# Altium PCB SMD VR Cond Neo_2023-05-26.pcbdoc
Units mil, origin at the board's own origin, x right, y up, seen from the top; angles counter-clockwise.
Board outline 2392.95 x 2392.99 mil, 2 copper layers (Top Layer, Bottom Layer); 17 components, 16 nets, 46 pads, 9 vias.
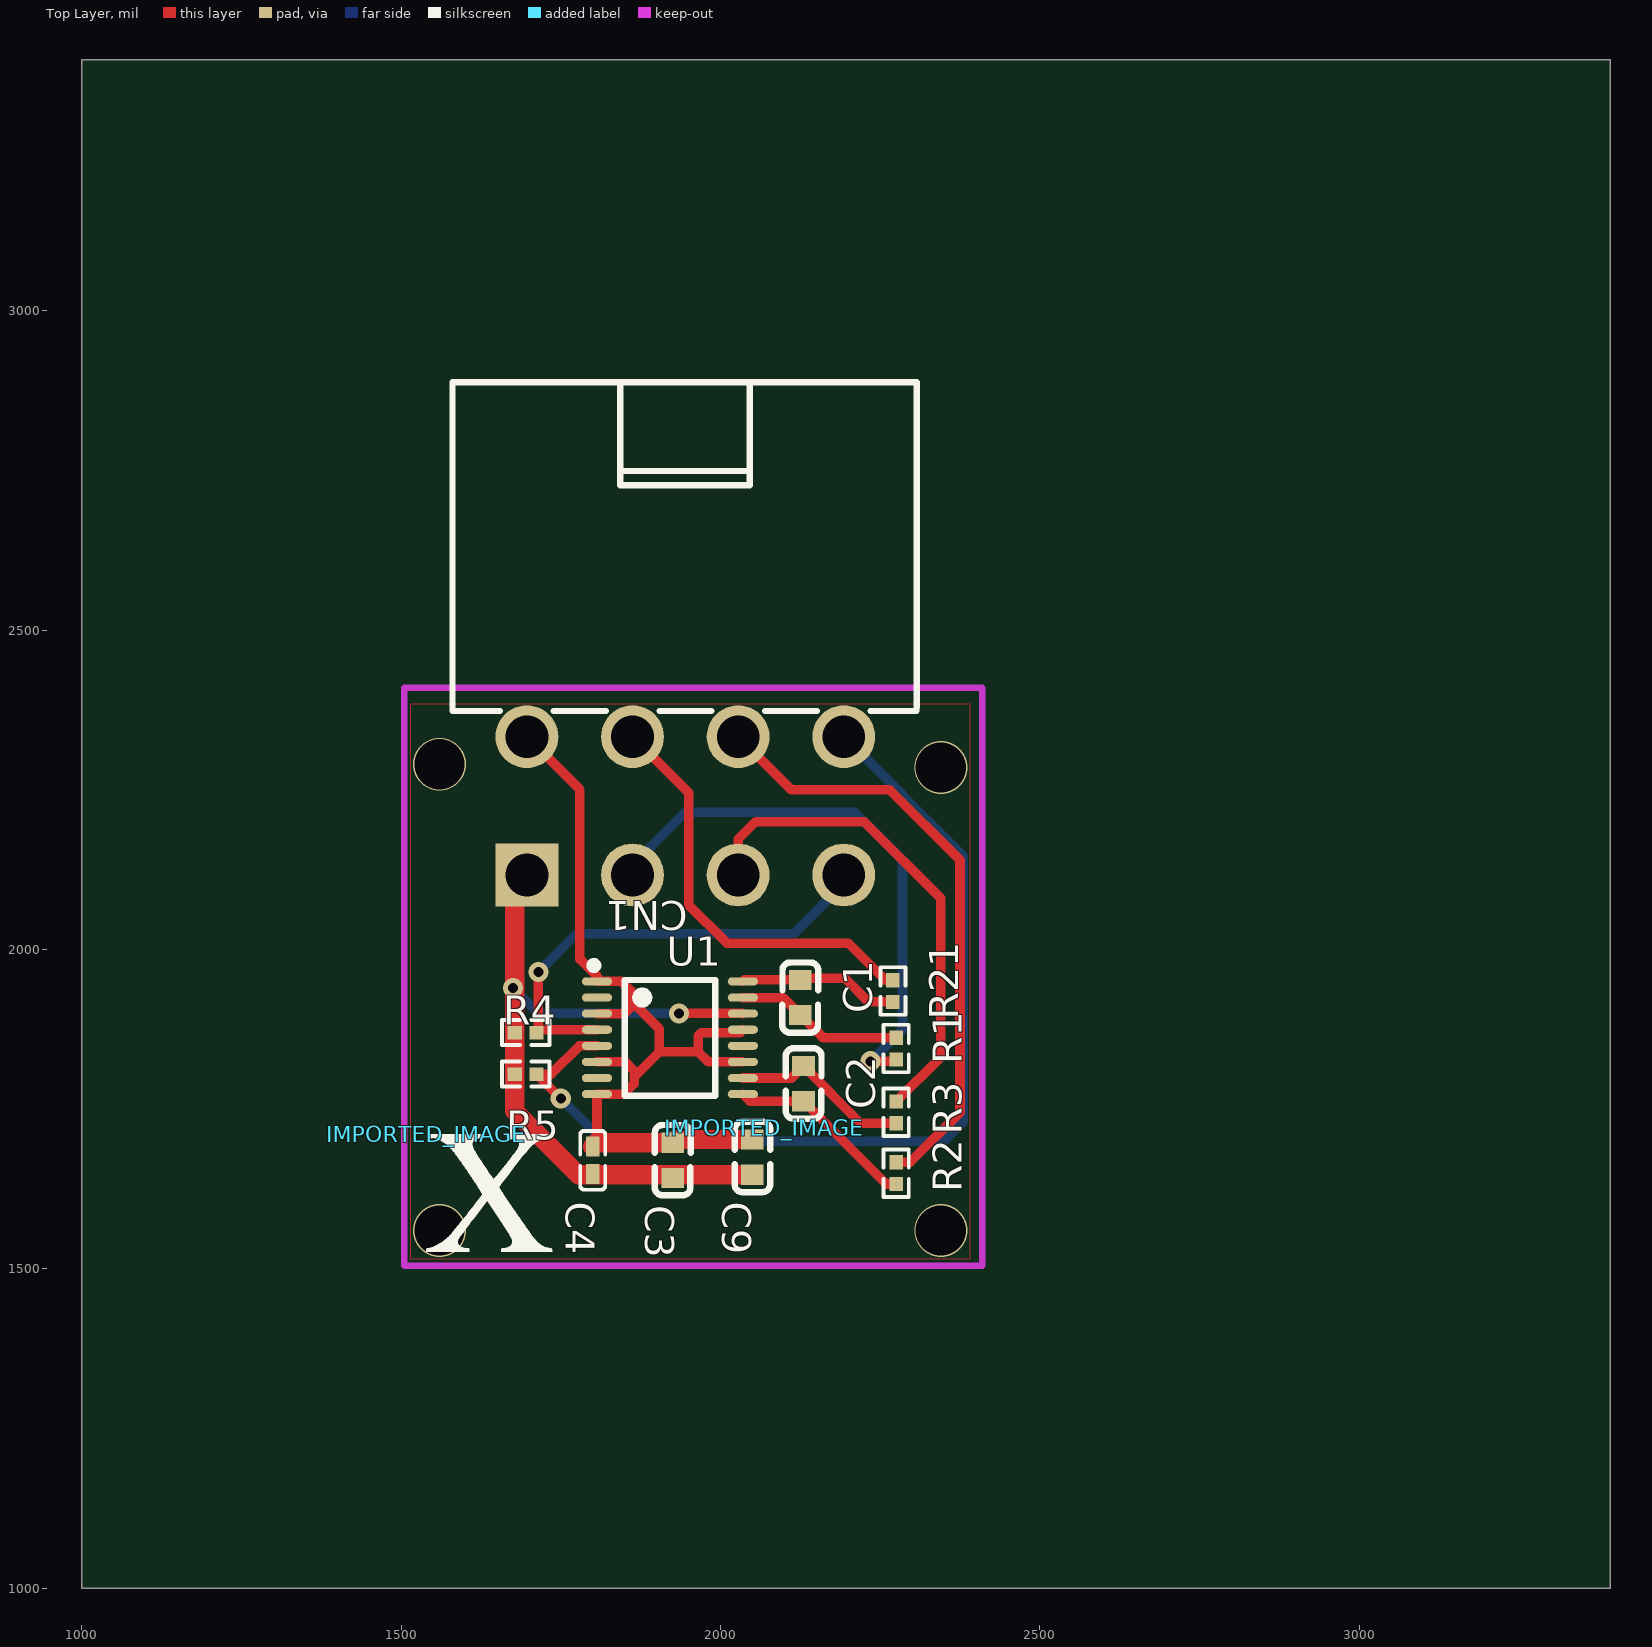
[diagram p0: Top Layer view]
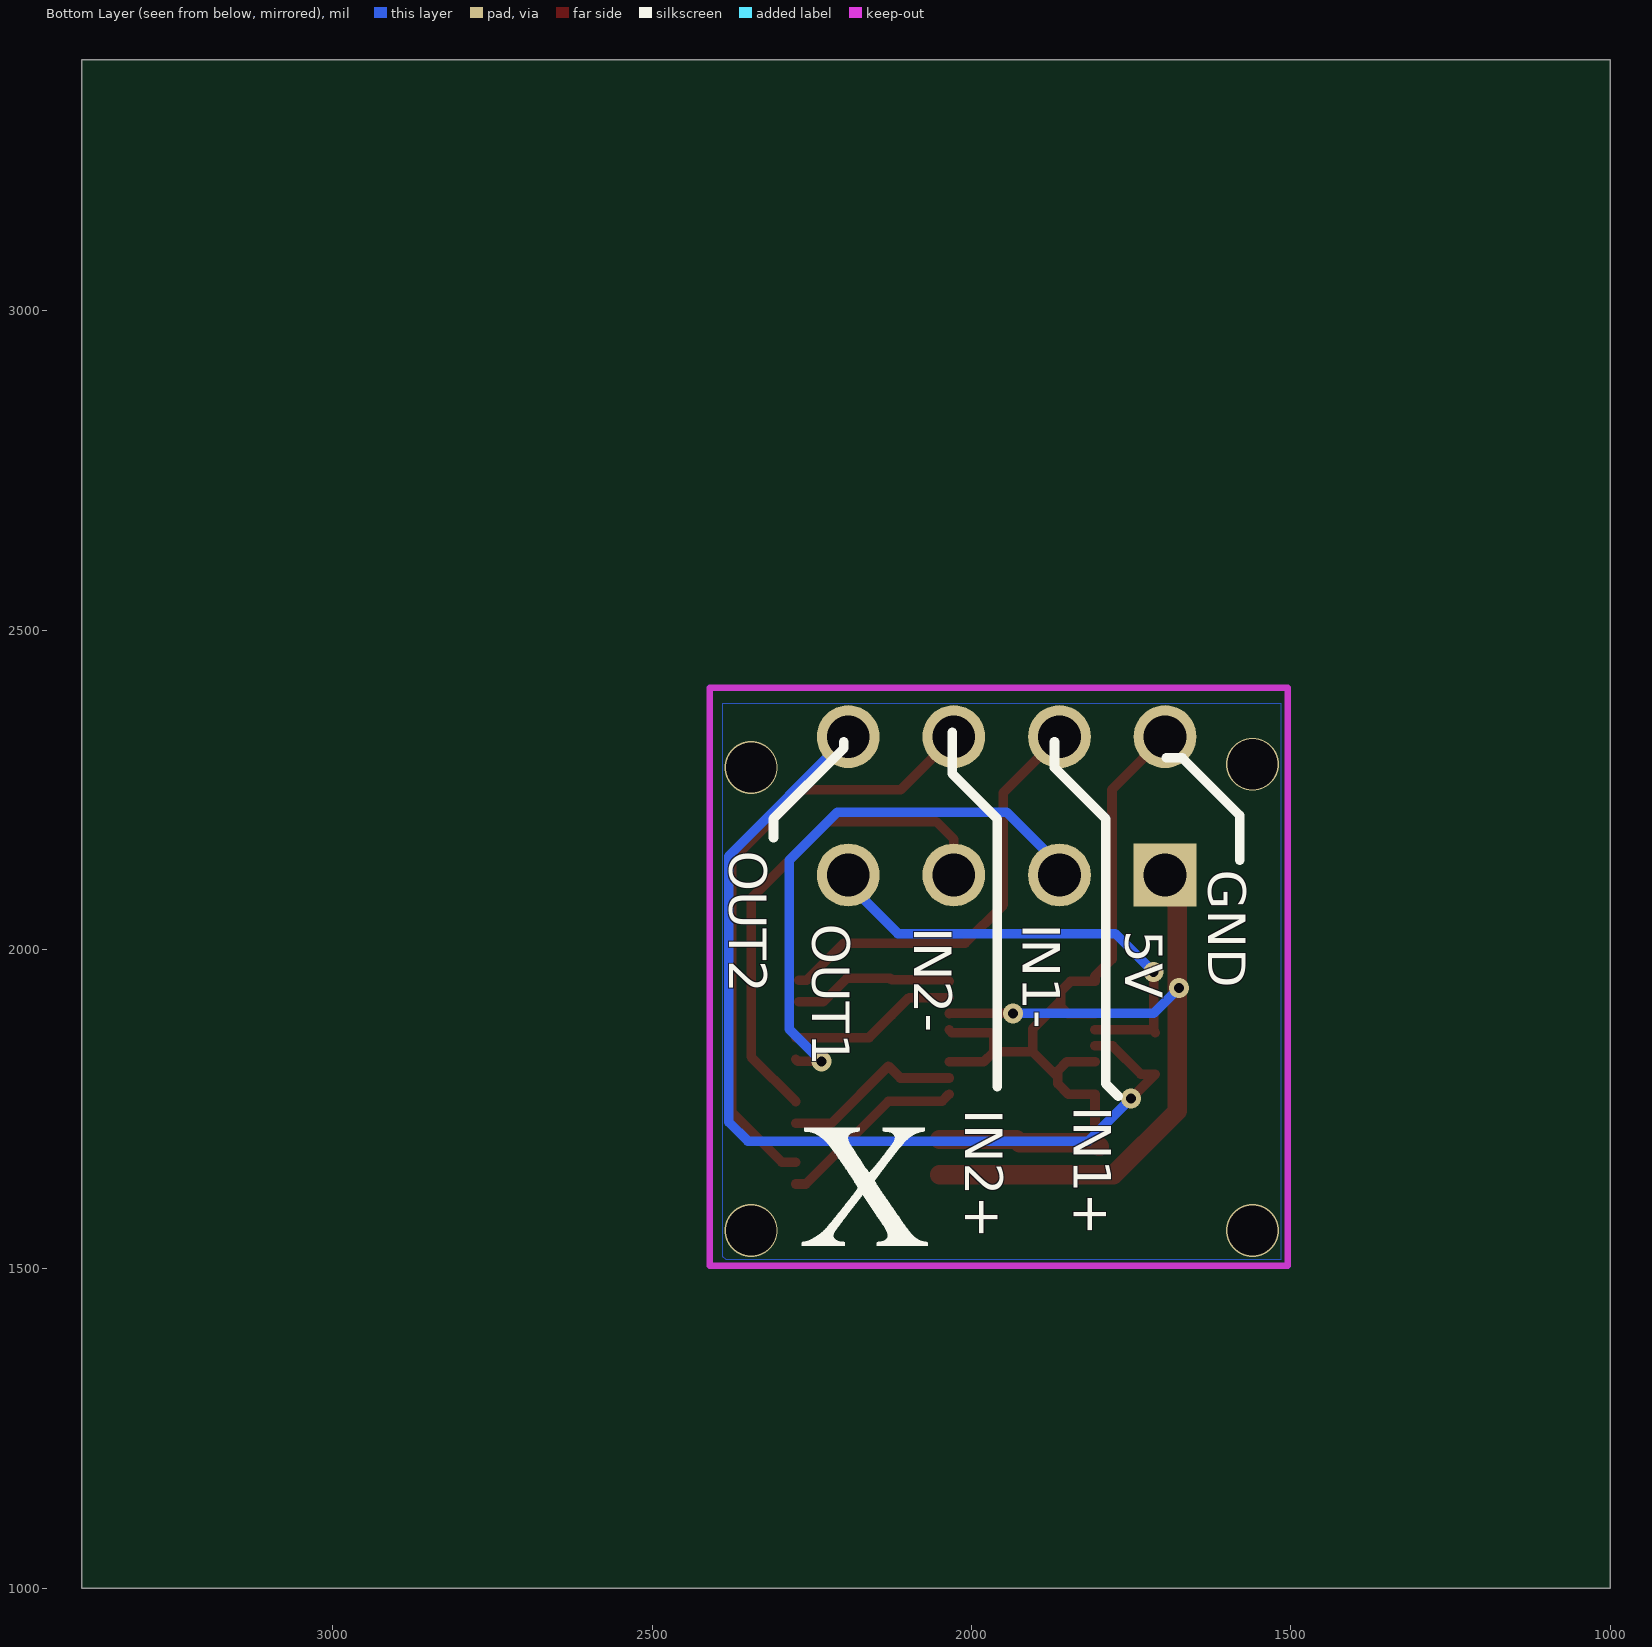
[diagram p1: Bottom Layer view, seen from below]

## Layer stack, top to bottom
Top Layer: signal copper (thickness not stored)
Dielectric: dielectric 12.6, FR-4, Dk 4.8
Bottom Layer: signal copper (thickness not stored)

## Board outline
3392.95,1000 1000,1000 1000,3392.99 3392.95,3392.99

## Components (designator, comment, footprint, x,y, rotation, side; value= is the part's Value field where it differs from the comment)
C1 "1nF" C0603 2125,1925 r90 top
C2 "1nF" C0603 2130,1790 r270 top
C3 "1uF" C0603 1925,1670 r270 top
C4 "10nF" C0402 1800,1670 r270 top
C9 "100nF" C0603 2050,1675 r270 top
CN1 "5557R-2*4P" CONN-TH_8P-P4.20_5557R-2X4P 1945,2225 r180 top
IMPORTED_IMAGE "IMPORTED_IMAGE" IMPORTED_IMAGE 1539.53,1710.7 r0 top
IMPORTED_IMAGE "IMPORTED_IMAGE" IMPORTED_IMAGE 2068.62,1720.7 r0 top
R1 "10kΩ" R0402 2275,1845 r270 top
R2 "10kΩ" R0402 2275,1650 r90 top
R3 "10kΩ" R0402 2275,1745 r90 top
R4 "10kΩ" R0402 1695,1870 r0 top
R5 "10kΩ" R0402 1695,1805 r0 top
R21 "10kΩ" R0402 2270,1935 r90 top
U1 "MAX9926UAEE+T" QSOP-16_150MIL 2035,1950 r0 top
? "" ? 1956.93,2515.43 r0 top
? "" ? 2650.48,1957.5 r0 top

## Footprints (in the part's own frame and the unit in brackets; to place one, negate y for a bottom-side part, rotate by r counter-clockwise, add the part's x,y. Pads: shape width x height; smd on the part's side, far side on the other; paste and mask are expansions set on the pad)
C0402 [mm]
  rect 0.79x0.54 smd: 1(-0.545,0) 2(0.545,0)
  silkscreen extent -1.17,-0.5 1.17,0.5
C0603 [mm]
  rect 0.8x0.9 smd: 1(-0.7,0) 2(0.7,0)
  silkscreen extent -1.41,-0.71 1.39,0.72
CONN-TH_8P-P4.20_5557R-2X4P [mm]
  rect 2.5x2.5 hole 1.7: 1(6.3,2.75)
  round 2.5 hole 1.7: 2(6.3,-2.75) 3(2.1,2.75) 4(2.1,-2.75) 5(-2.1,2.75) 6(-2.1,-2.75) 7(-6.3,2.75) 8(-6.3,-2.75)
  silkscreen extent -9.2,-16.84 9.26,-3.77
IMPORTED_IMAGE [mil]
  silkscreen extent 0,-184 197,0
QSOP-16_150MIL [mm]
  oval 1.2x0.32 smd: 1(-5.8,0) 2(-5.8,-0.64) 3(-5.8,-1.28) 4(-5.8,-1.92) 5(-5.8,-2.56) 6(-5.8,-3.2) 7(-5.8,-3.84) 8(-5.8,-4.48) 9(0,-4.48) 10(0,-3.84) 11(0,-3.2) 12(0,-2.56) 13(0,-1.92) 14(0,-1.28) 15(0,-0.64) 16(0,0)
  silkscreen extent -6.08,-4.54 -1.1,0.78
R0402 [mm]
  rect 0.566x0.54 smd: 1(-0.433,0) 2(0.433,0)
  silkscreen extent -0.94,-0.5 0.94,0.5
? [mil]

## Via types
v1: diameter 31.5, hole 15.75, Top Layer to Bottom Layer, tented both sides, 5 vias
v2: diameter 82.68, hole 78.74, Top Layer to Bottom Layer, tented both sides, 4 vias

## Nets (pads, with @x,y where several pads share a name; then routed paths per layer and width w, separated by ;. In a path a pad name is that pad's centre, name@x,y a point inside that pad or via, vN(x,y) a via of type N, cw(c..) or ccw(c..) an arc to the next point about the centre after c; other vN are vias at no path point)
+5V: C3.2 C4.2 C9.2 CN1.1 R4.1 R5.1 U1.14 | length 1167.6
  Top Layer w15: v1(1935,1900) 2034.61,1900 U1.14
  Top Layer w30: CN1.1 1677.96,2097.73 R4.1 R5.1 1677.96,1747.04 1777.56,1647.44 C9.2
  Bottom Layer w15: v1(1675,1940) 1715,1900 v1(1935,1900)
GND: C3.1 C4.1 C9.1 CN1.2 U1.1 U1.3 U1.6 U1.8 U1.11 U1.13 | length 1450
  Top Layer w15: CN1.2 1780,2250.23 1780,1985 1806.66,1958.34 U1.1 1845,1950 1860,1935 1860,1910 1849.61,1899.61 U1.3 ; C4.1 1806.66,1698.12 U1.8 1848.62,1773.62 1865,1790 1865,1810 1850.99,1824.01 U1.6 ; 1860,1920.1 1904.4,1875.69 1904.4,1840 ; 1865,1800.6 1904.4,1840 ; U1.11 1980.99,1824.01 1965,1840 ; U1.13 2030.59,1870 1970,1870 1965,1865 1965,1840 ; 1904.4,1840 1965,1840
  Top Layer w30: C4.1 1806.1,1697.56 C3.1 1930,1702.56 C9.1
IN1+: CN1.4 R21.2 | length 668.4
  Top Layer w15: CN1.4 1950,2245.59 1950,2070 2010,2010 2200,2010 2257.96,1952.04 R21.2
IN1-: CN1.3 R1.2 | length 880.5
  Top Layer w15: v1(2235,1825) 2272.04,1825 R1.2
  Bottom Layer w15: CN1.3 1862.33,2132.32 1945,2215 2210,2215 2285,2140 2285,1875 v1(2235,1825)
IN2+: CN1.6 R2.2 | length 954.7
  Top Layer w15: CN1.6 2110.94,2250 2265,2250 2375,2140 2375,1745 2297.04,1667.04 R2.2
IN2-: CN1.5 R3.2 | length 781.2
  Top Layer w15: CN1.5 2027.67,2172.68 2055,2200 2225,2200 2345,2080 2345,1832.04 R3.2
OUT1: CN1.7 R4.2 U1.4 | length 741.6
  Top Layer w15: v1(1715,1965) 1715,1872.96 R4.2 1716.45,1874.41 U1.4
  Bottom Layer w15: v1(1715,1965) 1775,2025 2115,2025 2193.03,2103.03 CN1.7
OUT2: CN1.8 R5.2 U1.5 | length 1519.6
  Top Layer w15: v1@1750,1765 v1(1750,1767.04) R5.2 1735,1805 1779.21,1849.21 U1.5
  Bottom Layer w15: v1(1750,1767.04) 1817.04,1700 2350,1700 2380,1730 2380,2146.3 CN1.8
S$2189: 
S$2193: 
S$2197: 
S$2201: 
U1_9: C2.2 R2.1 U1.9 | length 298.3
  Top Layer w15: U1.9 2046.18,1762.44 C2.2 2259.48,1632.96 R2.1
U1_10: C2.1 R3.1 U1.10 | length 284.9
  Top Layer w15: U1.10 2111.26,1798.82 C2.1 2219.6,1727.96 R3.1
U1_15: C1.1 R1.1 U1.15 | length 266
  Top Layer w15: U1.15 2097.64,1924.8 C1.1 2160.4,1862.04 R1.1
U1_16: C1.2 R21.1 U1.16 | length 252.4
  Top Layer w15: U1.16 2037.56,1952.56 C1.2 2127.44,1955 2195,1955 2232.04,1917.96 R21.1
pads on no net: U1.2 U1.7 U1.12
copper on no net:
  other v2: 1560,1560 2345,1560 2345,2285 1560,2290

## Polygon pours and split planes (outlines as drawn)
GND on Top Layer (solid): 1515,2385 2390,2385 2390,1515 1515,1515
+5V on Bottom Layer (solid): 1520,2385 2390,2385 2390,1520 2385,1515 1515,1515 1515,2385

## Silkscreen, mask and mechanical layers (free items; w line width, h text height)
Bottom Overlay:
  lines w15 net S$2189: 1580,2140 1580,2210 1670,2300 1695,2300
  lines w15 net S$2193: 1770,1770 1790,1790 1790,2205 1870,2285 1870,2325
  lines w15 net S$2197: 1960,1785 1960,2205 2030,2275 2030,2340
  lines w15 net S$2201: 2200,2325 2200,2315 2310,2205 2310,2175
  text "OUT2" at 2379.53,2155 h59.05 r90
  text "GND" at 1629.53,2125 h59.05 r90
  text "IN1-" at 1919.53,2040 h59.05 r90
  text "OUT1" at 2249.53,2040 h59.05 r90
  text "IN2-" at 2089.53,2035 h59.05 r90
  text "5V" at 1759.53,2030 h59.05 r90
  text "IN1+" at 1839.53,1755 h59.05 r90
  text "IN2+" at 2009.53,1750 h59.05 r90